# EAGLE board fet_overdrive (EAGLE 9.6.2)

Size 100 x 80 mm. Coordinates in mm from the lower left corner, seen from the top.
Outline: 0,0 100,0 100,80 0,80 0,0
Copper layers (1*16): Top 0.035mm / dielectric 1.5mm / Bottom 0.035mm
Design rules "default": minimum track width 6mil, minimum drill 0.35mm, track to track 6mil, track to pad 6mil, pad to pad 6mil, via to via 6mil, smd to smd 6mil, copper to edge 40mil, drill to drill 6mil, minimum pad ring 10mil, minimum via ring 8mil, stop-mask expansion 4mil, vias tented up to drill 0mil, thermal gap 10mil

## Placement (x,y rotation side)
U$1  [LOGO]  13.97,25.4 0 top
U$2  [LOGO]  44.45,21.59 0 top
U$3  [LOGO2]  -29.21,-30.48 0 top  (outside the outline)

## Library data of the parts
U$1 = Graphics_v1
U$2 = Graphics v2
U$3 = Graphics v3